# Altium PCB Tube02.PcbDoc
Units mil, origin at the board's own origin, x right, y up, seen from the top; angles counter-clockwise.
Board outline 3880 x 3880 mil, 2 copper layers (Top Layer, Bottom Layer); 105 components, 67 nets, 361 pads, 56 vias.
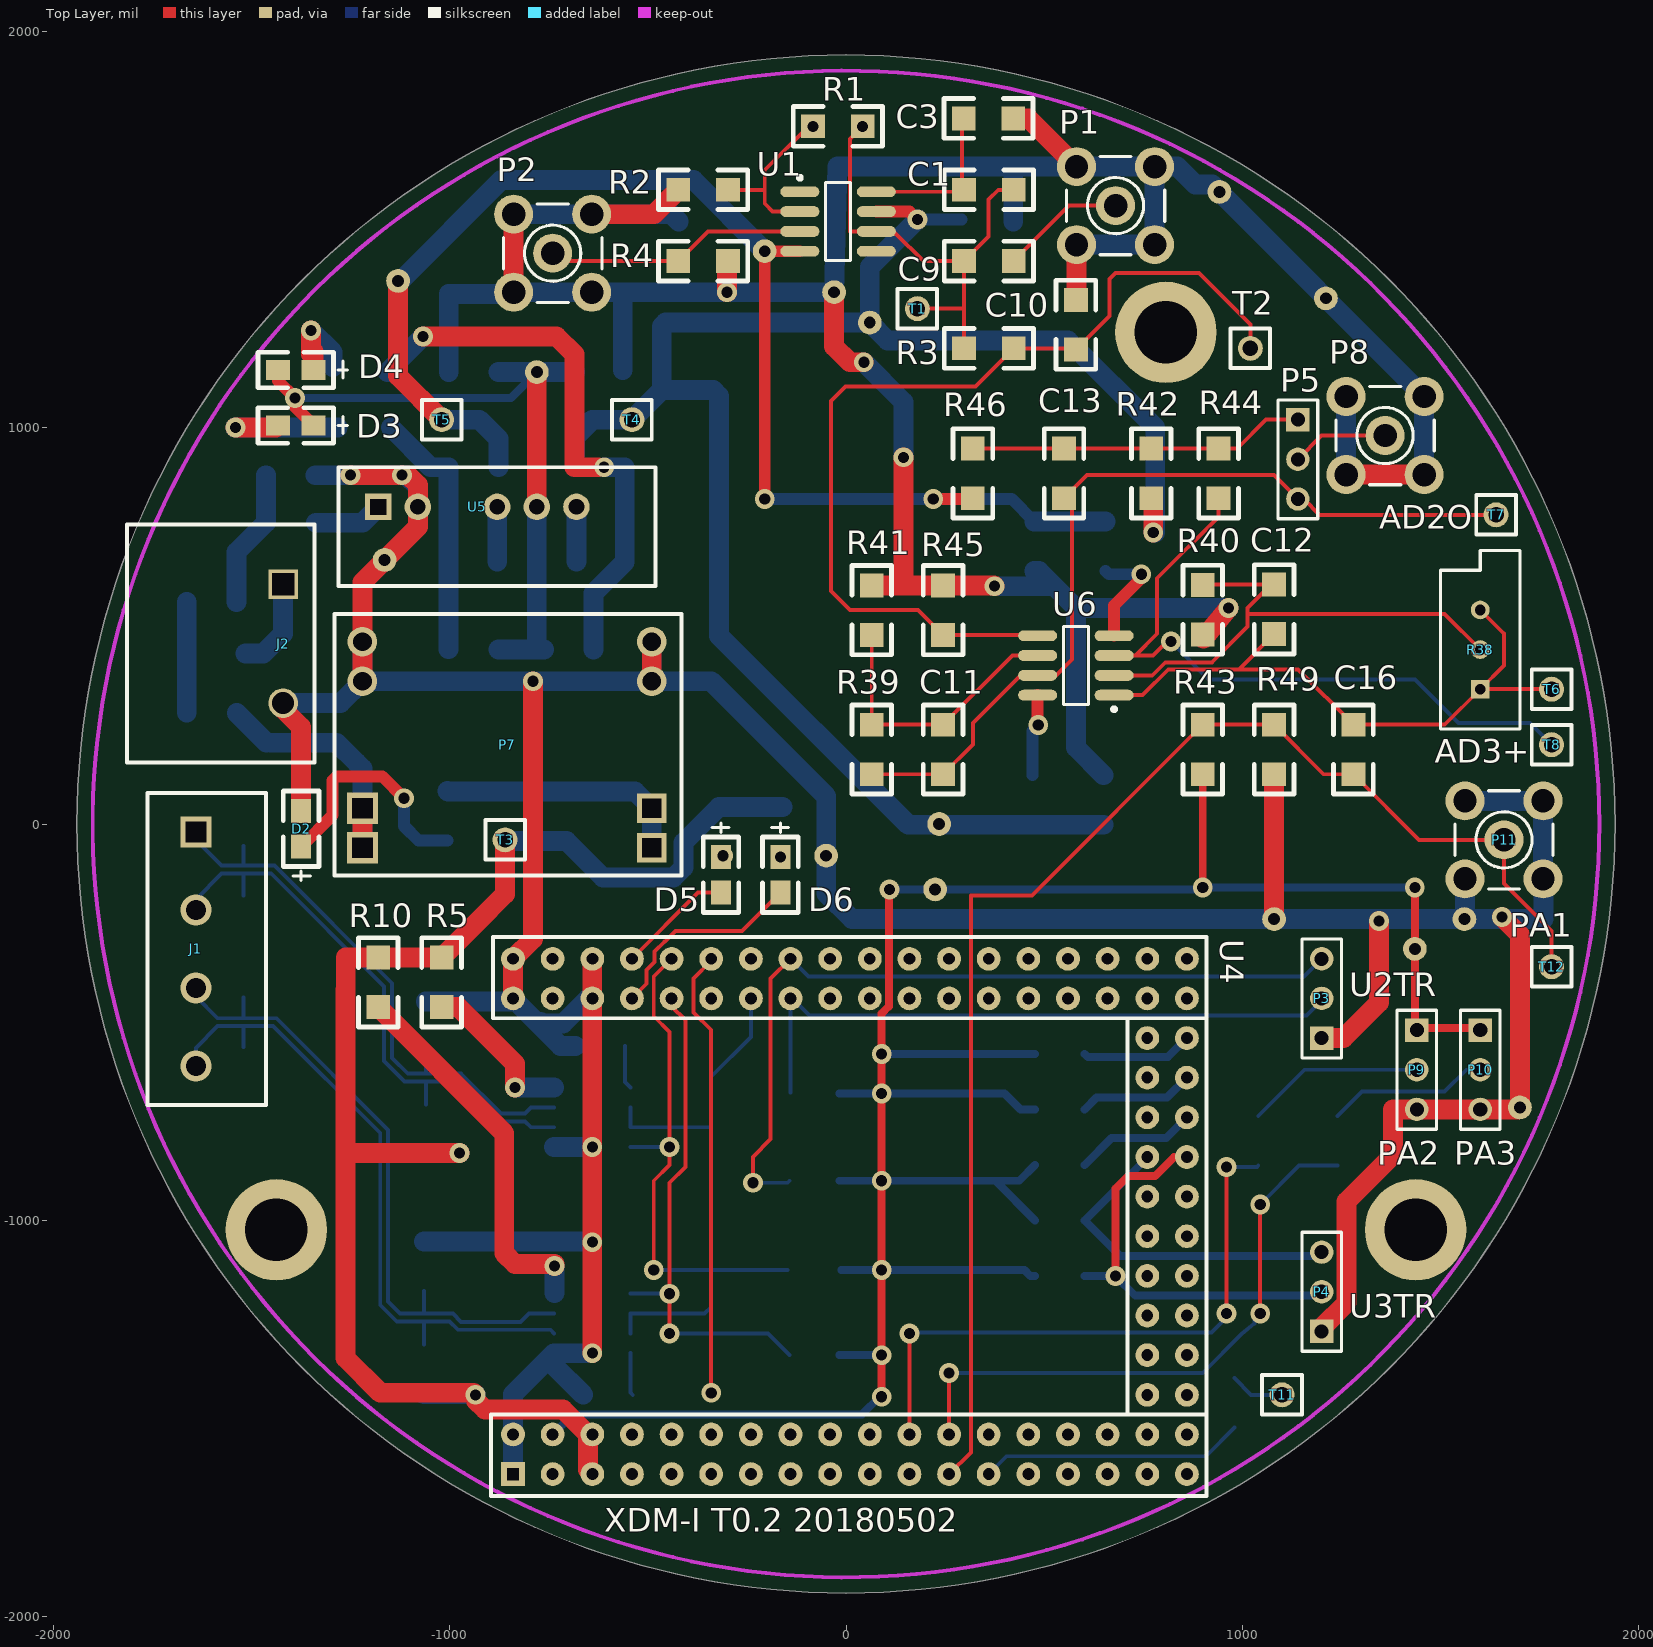
[diagram p0: Top Layer view]
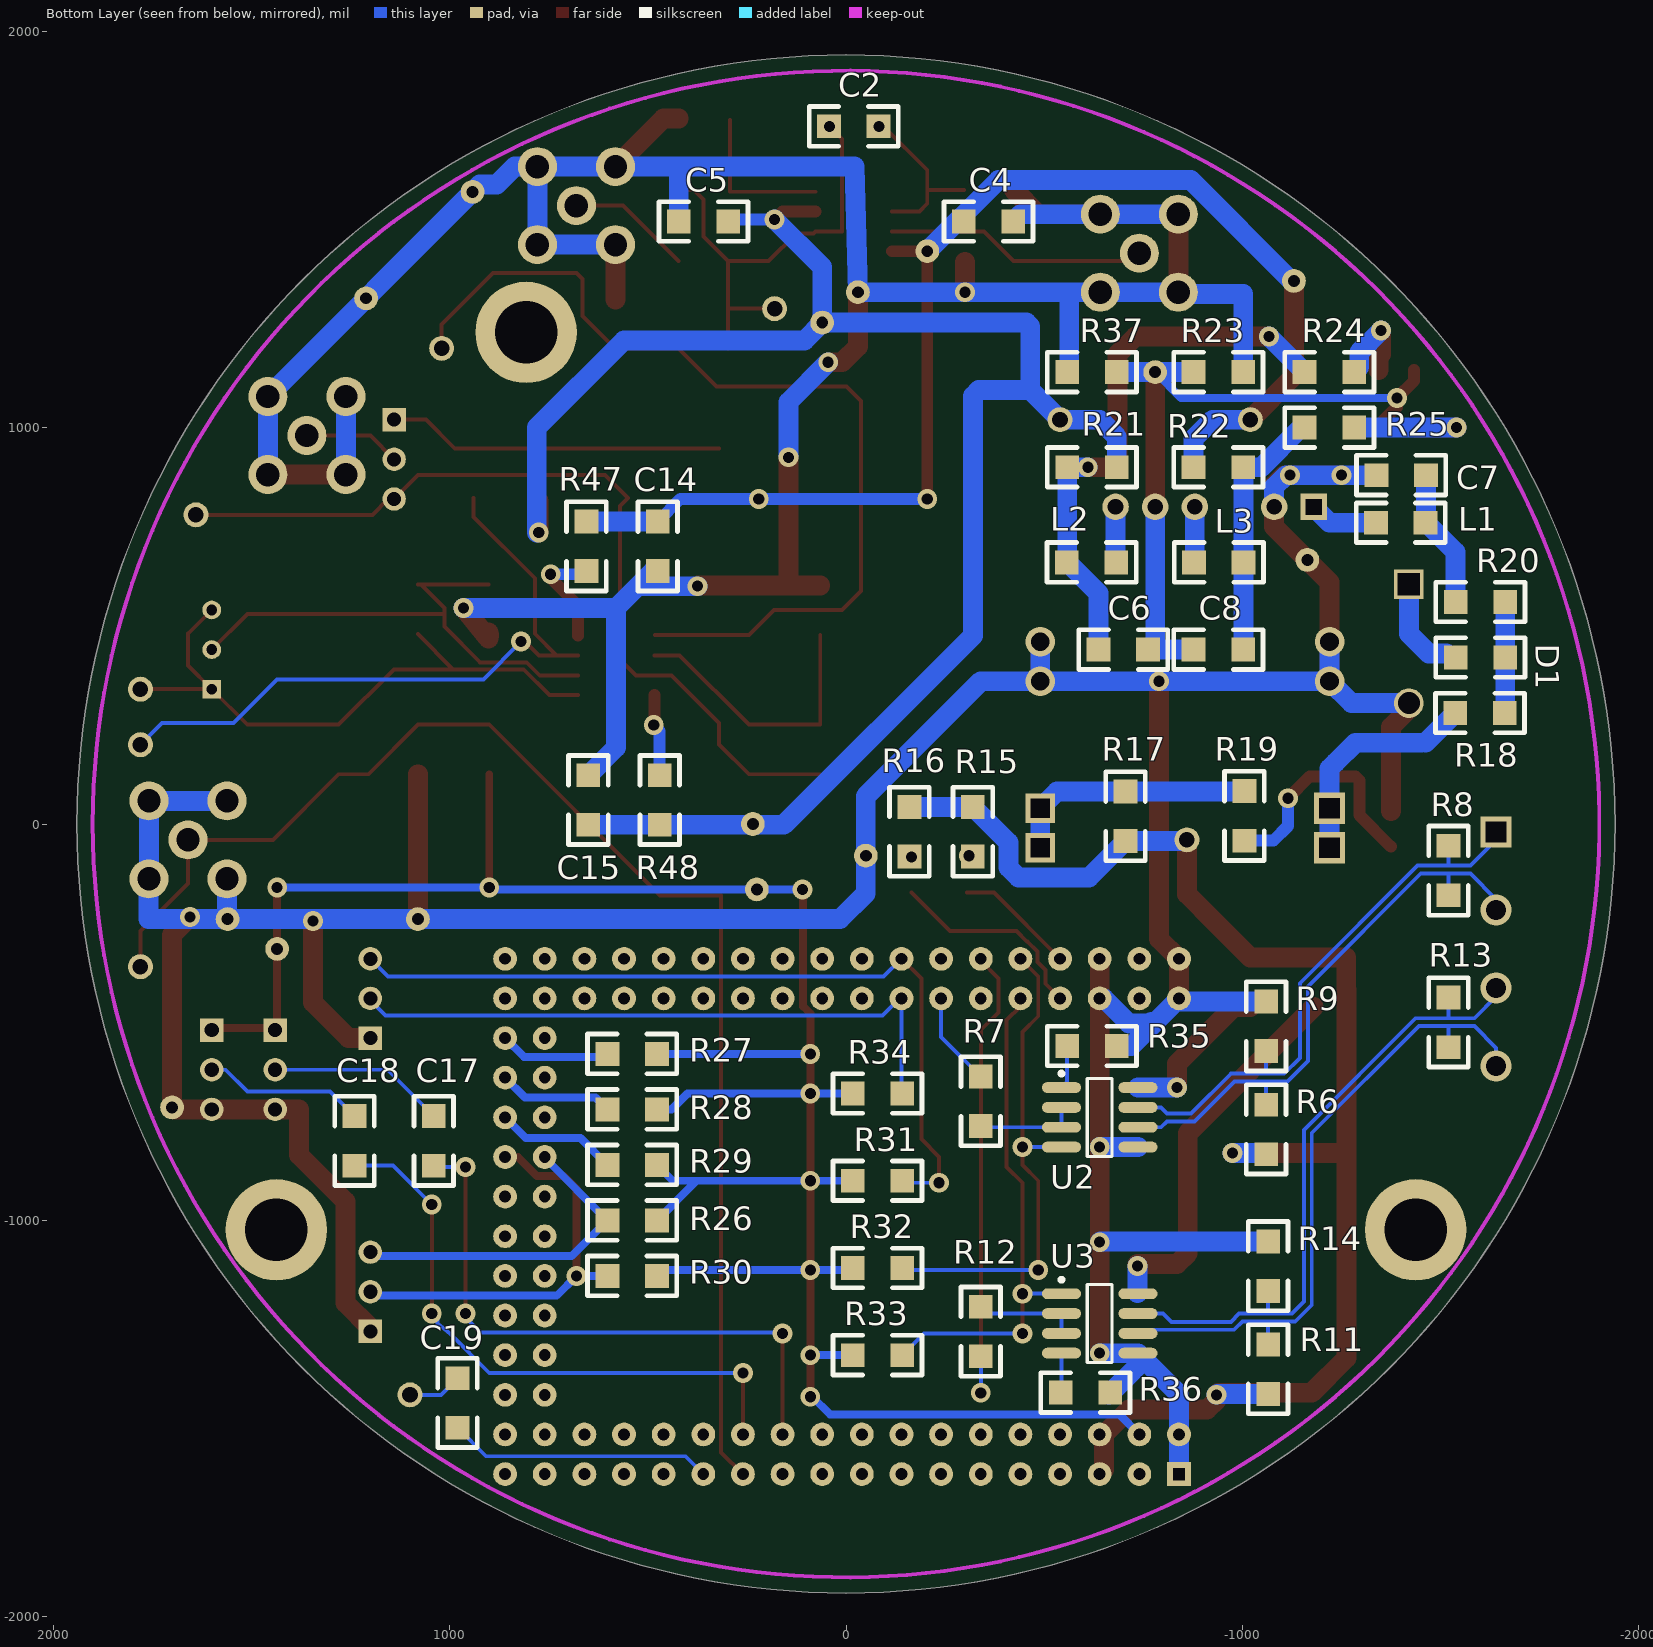
[diagram p1: Bottom Layer view, seen from below]

## Layer stack, top to bottom
Top Layer: signal copper 1.4
Dielectric: dielectric 12.6, FR-4, Dk 4.8
Bottom Layer: signal copper 1.4

## Board outline
0,-1940 cw(c0,0) -1940,0 cw(c0,0) 0,1940 cw(c0,0) 1940,0 cw(c0,0)

## Design rules (kind name [scope] priority, off if disabled: settings)
Clearance [All] p1: gap=8
ComponentClearance [All] p1 off: gap=10 collisioncheckmode=3 verticalgap=10 showdistances=FALSE
DiffPairsRouting [All] p1: maxlimit=10 minlimit=10 mostfreqgap=10 maxuncoupledlength=500
HoleSize [All] p1: absolutevalues=TRUE maxlimit=200 minlimit=1 maxpercent=80.000 minpercent=20.000
PolygonConnect [All] p1: connectstyle=Relief reliefconductorwidth=10 reliefentries=4 polygonreliefangle="90 Angle"
RoutingVias [All] p1: holewidth=25 width=40 viastyle="Through Hole" minholewidth=28 minwidth=50 maxholewidth=28 maxwidth=50
SilkscreenOverComponentPads [All] p1: minsilkscreentomaskgap=10
SolderMaskExpansion [All] p1: expansion=4
Width Width_5V [InNet('VCC5')] p1: maxlimit=50 minlimit=20 preferedwidth=50
Width Width_All [All] p2: maxlimit=50 minlimit=10 preferedwidth=10
Width Width_VCC5- [InNet('VCC5-')] p3: maxlimit=50 minlimit=20 preferedwidth=50
Width Width_VCC5+ [InNet('VCC5+')] p4: maxlimit=50 minlimit=20 preferedwidth=50
Width Width_12 [InNet('VCC12')] p5: maxlimit=50 minlimit=20 preferedwidth=50
24 further rules are at their usual default settings.

## Classes and differential pairs
component class AMP02: C1 C2 C3 C4 C5 C9 C10 C11 C12 C13 C14 C15 C16 P1 P2 P5 P8 R1 R2 R3 R4 R38 R39 R40 R41 R42 R43 R44 R45 R46 R47 R48 R49 T1 T2 T6 T7 T8 T12 U1 U6
component class MCU02: C17 C18 C19 D5 D6 P9 P10 P11 R15 R16 R26 R27 R28 R29 R30 R31 R32 R33 R34 T11 U4 U7 U8
component class Power02: C6 C7 C8 D1 D2 D3 D4 J2 L1 L2 L3 P7 R17 R18 R19 R20 R21 R22 R23 R24 R25 R37 T3 T4 T5 U5
component class Commu02: J1 P3 P4 R5 R6 R7 R8 R9 R10 R11 R12 R13 R14 R35 R36 U2 U3
differential pair CON2: +CON2_P -CON2_N
differential pair CON1: +CON1_P -CON1_N

## Components (designator, comment, footprint, x,y, rotation, side; value= is the part's Value field where it differs from the comment)
C1 "Cap Semi" 1206 300,1600 r0 top
C2 "Cap Semi" 1206 -80,1760 r0 bottom
C3 "Cap Semi" 1206 420,1780 r180 top
C4 "Cap Semi" 1206 -420,1520 r0 bottom
C5 "Cap Semi" 1206 420,1520 r180 bottom
C6 "Cap Semi" 1206 -760,440 r0 bottom
C7 "Cap Semi" 1206 -1340,880 r180 bottom
C8 "Cap Semi" 1206 -1000,440 r0 bottom
C9 "Cap Semi" 1206 300,1420 r0 top
C10 "Cap Semi" 1206 580,1320 r270 top
C11 "Cap Semi" 1206 245,248.5 r270 top
C12 "Cap Semi" 1206 1080,602 r270 top
C13 "Cap Semi" 1206 550,824 r90 top
C14 "Cap Semi" 1206 475,640 r90 bottom
C15 "Cap Semi" 1206 650,121 r270 bottom
C16 "Cap Semi" 1206 1280,248.5 r270 top
C17 "Cap Semi" 1206 1040,-860 r90 bottom
C18 "Cap Semi" 1206 1240,-860 r90 bottom
C19 "Cap Semi" 1206 980,-1400 r270 bottom
D1 "LED2" 1206 -1540,420 r180 bottom
D2 "LED2" 0805_LED -1380,-60 r90 top
D3 "LED2" 0805_LED -1340,1000 r180 top
D4 "LED2" 0805_LED -1340,1140 r180 top
D5 "LED2" 0805_led -310,-80 r270 top
D6 "LED2" 0805_led -160,-80 r270 top
J1 "KF301-4P" KF301-4P -1640,-20 r270 top locked
J2 "XK7.62-2P" XK7.62-2P -1420,605 r0 top locked
L1 "Inductor" 1206 -1460,760 r0 bottom
L2 "Inductor" 1206 -680,660 r0 bottom
L3 "Inductor" 1206 -880,660 r180 bottom
P1 "SMB" SMB_V-RJ45 680,1560 r0 top (schematic designator P2)
P2 "SMB" SMB_V-RJ45 -740,1440 r0 top
P3 "Header 3" HDR1X3 1200,-540 r90 top
P4 "Header 3" HDR1X3 1200,-1280 r90 top
P5 "Header 3" HDR1X3 1140,1020 r270 top
P7 "DC-DC5V3A" DC-DC3A -1220,460 r0 top locked
P8 "SMB" SMB_V-RJ45 1360,980 r0 top (schematic designator P1)
P9 "Header 3" HDR1X3 1440,-520 r270 top
P10 "Header 3" HDR1X3 1600,-520 r270 top
P11 "SMB" SMB_V-RJ45 1660,-40 r0 top (schematic designator P6)
R1 "Res Semi" 1206 40,1760 r180 top
R2 "Res Semi" 1206 -300,1600 r180 top
R3 "Res Semi" 1206 300,1200 r0 top
R4 "Res Semi" 1206 -300,1420 r180 top
R5 "Res Semi" 1206 -1020,-460 r90 top
R6 "Res Semi" 1206 -1060,-710 r270 bottom
R7 "Res Semi" 1206 -340,-760 r90 bottom
R8 "Res Semi" 1206 -1520,-57 r270 bottom
R9 "Res Semi" 1206 -1060,-450 r270 bottom
R10 "Res Semi" 1206 -1180,-460 r90 top
R11 "Res Semi" 1206 -1065,-1315 r270 bottom
R12 "Res Semi" 1206 -340,-1220 r270 bottom
R13 "Res Semi" 1206 -1520,-440 r270 bottom
R14 "Res Semi" 1206 -1065,-1055 r270 bottom
R15 "Res Semi" 1206 -320,-80 r90 bottom
R16 "Res Semi" 1206 -160,-80 r90 bottom
R17 "Res Semi" 1206 -705,80 r270 bottom
R18 "Res Semi" 1206 -1660,280 r0 bottom
R19 "Res Semi" 1206 -1005,-40 r90 bottom
R20 "Res Semi" 1206 -1540,560 r180 bottom
R21 "Res Semi" 1206 -560,900 r180 bottom
R22 "Res Semi" 1206 -1000,900 r0 bottom
R23 "Res Semi" 1206 -1000,1140 r0 bottom
R24 "Res Semi" 1206 -1280,1140 r0 bottom
R25 "Res Semi" 1206 -1280,1000 r0 bottom
R26 "Res Semi" 1206 600,-1000 r180 bottom
R27 "Res Semi" 1206 600,-580 r180 bottom
R28 "Res Semi" 1206 600,-720 r180 bottom
R29 "Res Semi" 1206 600,-860 r180 bottom
R30 "Res Semi" 1206 600,-1140 r180 bottom
R31 "Res Semi" 1206 -140,-900 r0 bottom
R32 "Res Semi" 1206 -140,-1120 r0 bottom
R33 "Res Semi" 1206 -140,-1340 r0 bottom
R34 "Res Semi" 1206 -140,-680 r0 bottom
R35 "Res Semi" 1206 -560,-560 r180 bottom
R36 "Res Semi" 1206 -543.54,-1434.46 r180 bottom
R37 "Res Semi" 1206 -560,1140 r180 bottom
R38 "RPot" VR5 1600,440 r90 top
R39 "Res Semi" 1206 65,248.5 r270 top
R40 "Res Semi" 1206 900,480 r90 top
R41 "Res Semi" 1206 65,600 r270 top
R42 "Res Semi" 1206 770,945 r270 top
R43 "Res Semi" 1206 900,248.5 r270 top
R44 "Res Semi" 1206 940,824 r90 top
R45 "Res Semi" 1206 245,600 r270 top
R46 "Res Semi" 1206 320,824 r90 top
R47 "Res Semi" 1206 655,761 r270 bottom
R48 "Res Semi" 1206 470,0 r90 bottom
R49 "Res Semi" 1206 1080,127.5 r90 top
T1 "TP1" TP1 180,1300 r0 top
T2 "TP1" TP1 1020,1200 r0 top
T3 "TP1" TP1 -860,-40 r0 top
T4 "TP1" TP1 -540,1020 r0 top
T5 "TP1" TP1 -1020,1020 r0 top
T6 "TP1" TP1 1780,340 r0 top
T7 "TP1" TP1 1640,780 r0 top
T8 "TP1" TP1 1780,200 r0 top
T11 "TP1" TP1 1100,-1440 r0 top
T12 "TP1" TP1 1780,-360 r0 top
U1 "AD797" SO-8C_M -20,1520 r0 top locked
U2 "MAX481CSA" NSO8_M -640,-740 r180 bottom
U3 "MAX481CSA" NSO8_M -640,-1260 r180 bottom
U4 "MCU_CON" MCU_CON -840,-1640 r0 top locked
U5 "A1205S" A1205S -1280,900 r0 top locked
U6 "NE5532AP" SO-8C_M 580,400 r180 top (schematic designator U4)

## Footprints (in the part's own frame and the unit in brackets; to place one, negate y for a bottom-side part, rotate by r counter-clockwise, add the part's x,y. Pads: shape width x height; smd on the part's side, far side on the other; paste and mask are expansions set on the pad)
0805_LED [mil]
  rect 60x50 smd: 1(3.07,-5.36) 2(93.07,-5.36)
  silkscreen extent -82,-50 143,40
0805_led [mil]
  rect 60x50 smd: 1(3.07,-5.36) 2(93.07,-5.36)
  silkscreen extent -82,-50 143,40
1206 [mil]
  rect 60x60 smd: 1(-2,0) 2(123,0)
  silkscreen extent -52,-50 173,50
A1205S [mm]
  rect 1.7x1.7 hole 1 square: 1(2.54,-2.54)
  round 1.7 hole 1: 2(5.08,-2.54) 4(10.16,-2.54) 5(12.7,-2.54) 6(15.24,-2.54)
  silkscreen extent 0,-7.62 20.32,0
DC-DC3A [mm] "DC-DC5V3Amodule"
  round 1.9 hole 1.2: 1(0,0) 2(0,-2.54) 7(18.542,-2.54) 8(18.542,0)
  rect 2x2 hole 1.3 square: 3(0,-10.668) 4(0,-13.208)
  rect 1.9x1.9 hole 1.2 square: 5(18.542,-13.208) 6(18.542,-10.668)
  silkscreen extent -1.78,-14.99 20.45,1.78
HDR1X3 [mm] "Connector; Header; 3 Position"
  rect 1.5x1.5 hole 0.9: 1(0,0)
  round 1.5 hole 0.9: 2(2.54,0) 3(5.08,0)
  silkscreen extent -1.27,-1.27 6.35,1.27
KF301-4P [mm]
  rect 2x2 hole 1.3 square: 1(0,0)
  round 2 hole 1.3: 2(5,0) 3(10,0) 4(15,0)
  silkscreen extent -2.5,-3.1 17.5,4.5
MCU_CON [mil] "Connector for STM32F407VET6 mini Borad"
  rect 60x60 hole 30 square: 1(0,0)
  round 60 hole 30: 2(0,100) 3(100,0) 4(100,100) 5(200,0) 6(200,100) 7(300,0) 8(300,100) 9(400,0) 10(400,100) 11(500,0) 12(500,100) 13(600,0) 14(600,100) 15(700,0) 16(700,100) 17(800,0) 18(800,100) 19(900,0) 20(900,100) 21(1000,0) 22(1000,100) 23(1100,0) 24(1100,100) 25(1200,0) 26(1200,100) 27(1300,0) 28(1300,100) 29(1400,0) 30(1400,100) 31(1500,0) 32(1500,100) 33(1600,0) 34(1600,100) 35(1700,0) 36(1700,100) 37(1700,200) 38(1600,200) 39(1700,300) 40(1600,300) 41(1700,400) 42(1600,400) 43(1700,500) 44(1600,500) 45(1700,600) 46(1600,600) 47(1700,700) 48(1600,700) 49(1700,800) 50(1600,800) 51(1700,900) 52(1600,900) 53(1700,1000) 54(1600,1000) 55(1700,1100) 56(1600,1100) 57(0,1300) 58(0,1200) 59(100,1300) 60(100,1200) 61(200,1300) 62(200,1200) 63(300,1300) 64(300,1200) 65(400,1300) 66(400,1200) 67(500,1300) 68(500,1200) 69(600,1300) 70(600,1200) 71(700,1300) 72(700,1200) 73(800,1300) 74(800,1200) 75(900,1300) 76(900,1200) 77(1000,1300) 78(1000,1200) 79(1100,1300) 80(1100,1200) 81(1200,1300) 82(1200,1200) 83(1300,1300) 84(1300,1200) 85(1400,1300) 86(1400,1200) 87(1500,1300) 88(1500,1200) 89(1600,1300) 90(1600,1200) 91(1700,1300) 92(1700,1200)
  silkscreen extent -55,-55 1750,1355
NSO8_M [mm] "SOIC, 8-Leads, Body 4.9x3.9mm, Pitch 1.27mm, IPC Low Density"
  oval 2.5x0.7 smd: 1(-2.45,1.905) 2(-2.45,0.635) 3(-2.45,-0.635) 4(-2.45,-1.905) 5(2.45,-1.905) 6(2.45,-0.635) 7(2.45,0.635) 8(2.45,1.905)
  silkscreen extent -2.58,-2.5 0.8,2.93, body extent -2,-2.5 2,2.5, height 1.75
SMB_V-RJ45 [mm] "Connector; SMB Straight"
  round 2.5 hole 1.5: 1(0,0) 2(-2.5,-2.5) 2(-2.5,2.5) 2(2.5,-2.5) 2(2.5,2.5)
  silkscreen extent -3.15,-3.15 3.15,3.15
SO-8C_M [mm] "SOIC, 8-Leads, Body 4.9x3.9mm, Pitch 1.27mm, IPC Low Density"
  oval 2.5x0.7 smd: 1(-2.45,1.905) 2(-2.45,0.635) 3(-2.45,-0.635) 4(-2.45,-1.905) 5(2.45,-1.905) 6(2.45,-0.635) 7(2.45,0.635) 8(2.45,1.905)
  silkscreen extent -2.57,-2.5 0.8,2.93, body extent -2,-2.5 2,2.5, height 1.75
TP1 [mm] "Test Point 1"
  round 1.6 hole 1: 1(0,0)
  silkscreen extent -1.27,-1.27 1.27,1.27
VR5 [mm] "Variable Resistor, Thru-Hole; 3 Leads"
  rect 1.2x1.2 hole 0.7: 1(-2.54,0)
  round 1.2 hole 0.7: 2(0,0) 3(2.54,0)
  silkscreen extent -5.08,-2.54 6.35,2.54
XK7.62-2P [mm]
  rect 1.9x1.9 hole 1.4 square: 1(0,0)
  round 1.9 hole 1.4: 2(0,-7.62)
  silkscreen extent -10,-11.43 2,3.81

## Part data
C1 C2 C3 C4 C5 C6 C7 C8 C9 C10 C11 C12 C13 C14 C15 C16 C17 C18 C19: "Capacitor (Semiconductor SIM Model)"
D1: library part "Diode 1N4001", "1 Amp General Purpose Rectifier"
D2 D3 D4 D5 D6: "Typical RED, GREEN, YELLOW, AMBER GaAs LED"
P1 P2 P8 P11: "SMB Straight Connector"
P3 P4 P5 P9 P10: "Header, 3-Pin"
P7: library part DC-DC3A
R1 R2 R3 R4 R5 R6 R7 R8 R9 R10 R11 R12 R13 R14 R15 R16 R17 R18 R19 R20 R21 R22 R23 R24 R25 R26 R27 R28 R29 R30 R31 R32 R33 R34 R35 R36 R37 R39 R40 R41 R42 R43 R44 R45 R46 R47 R48 R49: "Semiconductor Resistor"
R38: "Potentiometer"
U1: library part AD797AR, "Ultra-Low Distortion, Ultra-Low Noise Operational Amplifier"
U2 U3: "Low-Power, Slew-Rate-Limited RS-485/RS-422 Transceiver"
U6: "Dual Low-Noise Operational Amplifier"

## Free pads (board coordinates)
  round 60 hole 30: 0(-50,-80) 0(-30,1341.57) 1(60,1265) 1(1080,-240) 2(-1163.79,666.21) 2(-205,1445) 2(942.12,1594.73) 3(-780,1140) 3(1210.58,1326.27) 4(-1130,1370) 4(1435,-315) 5(1560,-240) 6(225,-165) 7(235,0) 8(1700,-715)
  round 255.91 hole 157.48: 1(-1437.01,-1023.62) 1(807.09,1240.16) 1(1437.01,-1023.62)

## Via types
v1: diameter 50, hole 28, Top Layer to Bottom Layer, 56 vias

## Nets (pads, with @x,y where several pads share a name; then routed paths per layer and width w, separated by ;. In a path a pad name is that pad's centre, name@x,y a point inside that pad or via, vN(x,y) a via of type N, cw(c..) or ccw(c..) an arc to the next point about the centre after c; other vN are vias at no path point)
AD1_IN+: P2.1 R4.2 U1.3 | length 662.9
  Top Layer w10: P2.1 -720,1420 R4.2 -348,1495 U1.3
AD1_IN-: C2.1 R1.2 R2.1 U1.2 | length 442.4
  Top Layer w10: R2.1 -205,1600 ; U1.2 -185,1545 -205,1565 -205,1600 ; v1(-83,1760) -95,1760 -205,1650 -205,1600
AD1_OUT: C1.2 C2.2 C9.1 R1.1 R3.1 T1.1 U1.6 | length 1189.4
  Top Layer w10: v1(42,1760) 10,1728 10,1495 U1.6 81.46,1490 125,1490 195,1420 C9.1 ; T1.1 298,1300 ; R3.1 298,1300 ; C1.2 385,1600 360,1575 360,1482 C9.1 ; 298,1300 C9.1
AD2+: C10.2 R3.2 R45.2 T2.1 U6.5 | length 2402.9
  Top Layer w10: U6.5@481.54,477 R45.2 182,540 10,540 -38,588 -38,1067 -1.5,1103.5 326.5,1103.5 R3.2 C10.2@577,1200 ; C10.2 665,1282 665,1375 680,1390 890,1390 1020,1260 T2.1
AD2-: C11.1 R39.1 R41.2 U6.6 | length 717.3
  Top Layer w10: R41.2 R39.1 C11.1 419.5,425 U6.6
AD2_OUT: C11.2 C13.1 P5.3 R39.2 T7.1 U6.7 | length 2227.6
  Top Layer w10: R39.2 C11.2 320,200.5 320,255 440,375 U6.7 530,375 570,415 570,802 C13.1 608,880 1080,880 P5.3 1155,820 1195,780 T7.1
AD3+: R44.1 T8.1 U6.3 | length 1709.7
  Top Layer w10: U6.3 730,425 ; v1(820,460) 810,460 775,425 730,425 ; R44.1 940,775 785,620 785,480 730,425
  Bottom Layer w10: v1(820,460) 915,365 1435,365 1545,255 1725,255 T8.1
AD3+B: C13.2 P5.1 R42.1 R44.2 R46.2 | length 850.2
  Top Layer w10: R46.2 C13.2 R42.1 R44.2 987,947 1060,1020 P5.1
AD3-: C12.1 R38.2 R40.2 U6.2 | length 1317.2
  Top Layer w10: U6.2 772.54,375 805.54,408 923,408 1013.19,498.19 1013.19,530 ; R40.2@902,604 C12.1 ; C12.1@1070,602 1013.19,545.19 1013.19,530 ; R38.2 1510,530 1013.19,530
AD3_OUT: C12.2 C16.1 R38.1 R38.3 T6.1 U6.1 | length 1600.9
  Top Layer w10: U6.1 748,325 813,390 991,390 ; C12.2 991,390 ; R38.3 1660,480 1660,400 R38.1 ; T6.1 R38.1 ; 991,390 1140.5,390 C16.1 1510.5,250.5 R38.1
AGND: C3.1 C4.1 C5.1 C10.1 C14.1 C15.1 P1.2 P2.2 P8.2 pad.0@-30,1341.57 pad.2@942.12,1594.73 pad.3@1210.58,1326.27 R2.2 R4.1 R23.1 R37.1 R40.1 R41.1 R45.1 | length 8205.3
  Top Layer w50: P2.2@-838.43,1341.57 P2.2@-838.43,1538.43 ; P2.2@-641.57,1538.43 -484.57,1538.43 R2.2 ; v1(-300,1341.57) R4.1@-300,1418 ; pad.0@-30,1341.57 -30,1205 10,1165 v1(45,1165) ; R41.1 145,602 ; v1(145,925) 145,602 ; v1(375,600) 373,602 R45.1 145,602 ; C3.1 460,1780 P1.2@581.57,1658.43 ; C10.1@581.57,1323.57 P1.2@581.57,1461.57 ; R40.1 R40.1@901.7,467.9 ; R40.1@901.7,482.9 R40.1@901.7,467.9 ; v1(965,545) 905.97,473.1 R40.1@901.7,467.9 ; P8.2@1261.57,881.57 P8.2@1458.43,881.57
  Bottom Layer w50: R23.1 -1002,1337 P2.2@-838.43,1337 ; P2.2@-838.43,1341.57 -641.57,1341.57 -563.43,1341.57 ; P2.2@-838.43,1538.43 -641.57,1538.43 -440.43,1538.43 C4.1 ; R37.1@-563.43,1145.43 -563.43,1341.57 ; v1(45,1165) 145,1065 v1@145,930 ; v1(375,600) 525,600 ; C5.1 422,1656.43 ; C14.1 487,638 525,600 ; P1.2@581.57,1461.57 778.43,1461.57 P1.2@778.43,1658.43 ; C15.1 580,193 580,545 ; v1(965,545) 580,545 ; P8.2@1261.57,881.57 P8.2@1261.57,1078.43 ; P8.2@1458.43,881.57 1458.43,1078.43 923.95,1612.9 881.18,1612.9 835.65,1658.43 P1.2@778.43,1658.43 ; -563.43,1341.57 v1(-300,1341.57) -30,1341.57 -21.57,1658.43 581.57,1658.43 P1.2@778.43,1658.43 ; 525,600 580,545
AVCC+: C5.2 C15.2 pad.1@60,1265 pad.7 R21.2 R42.2 R48.1 T4.1 U1.7 | length 4665.1
  Top Layer w30: U1.7 160,1545 v1(180,1525)
  Top Layer w50: v1(775,735) R42.2@775,815
  Bottom Layer w30: v1(180,1525) C5.2@292,1525
  Bottom Layer w50: R21.2 -683,977 -640,1020 T4.1 -465,1095 ; v1(180,1525) 60,1405 pad.1@60,1265 ; C15.2 R48.1 157,-2 -320,475 -320,1080 -335,1095 -465,1095 ; v1@780,735 780,1000 560,1220 105,1220 pad.1@60,1265 ; -465,1095 -465,1255 -455,1265 pad.1@60,1265
AVCC-: C4.2 C14.2 pad.2@-205,1445 pad.4@-1130,1370 R22.2 R46.1 R47.1 T5.1 U1.4 | length 3408.2
  Top Layer w30: v1(-205,820) -205,1445 U1.4 ; 245,820 R46.1@318,820
  Top Layer w50: pad.4@-1130,1370 -1130,1130 T5.1
  Bottom Layer w30: pad.4@-1128,1368 pad.4@-1126,1370 ; v1(-205,820) v1(220,820) 418,820 C14.2
  Bottom Layer w50: pad.4@-1130,1370 -1126,1370 -1124.08,1370 -869.58,1624.5 -384.5,1624.5 pad.2@-205,1445 ; T5.1 -925,1020 -877,972 R22.2 ; C14.2 R47.1
COM: C6.1 C8.2 D3.1 D4.2 pad.3@-780,1140 R23.2 R37.2 U5.5 | length 1805.2
  Top Layer w30: D4.2 -1433.07,1118.07 v1(-1390,1075) -1390,1052.29 D3.1
  Top Layer w50: U5.5 pad.3@-780,1140
  Bottom Layer w20: v1(-1390,1075) -845,1075 pad.3@-780,1140
  Bottom Layer w50: C8.2 C6.1 ; R23.2 -780,1140 R37.2 ; C6.1@-780,458 U5.5
CON1_N: J1.1 R8.1 R9.2 U2.7 | length 1433.6
  Bottom Layer w10: J1.1 -1640,-40 -1575,-105 -1520,-105 ; R8.1 -1520,-105 ; R9.2 -1060,-630 ; U2.7 -795,-715 -810,-730 -870,-730 -870.86,-730.86 -971.72,-630 -1060,-630 ; -1520,-105 -1441.72,-105 -1145,-401.72 -1145,-590 -1105,-630 -1060,-630
CON1_P: J1.2 R6.1 R8.2 U2.6 | length 1446.4
  Bottom Layer w10: J1.2 -1640,-190 -1575,-125 -1520,-125 ; R8.2 -1520,-125 ; R6.1 -1060,-650 ; U2.6 -795,-765 -810,-750 -861.72,-750 -862.57,-750.86 -879.14,-750.86 -980,-650 -1060,-650 ; -1520,-125 -1450,-125 -1165,-410 -1165,-598.28 -1113.28,-650 -1060,-650
CON2_N: J1.3 R13.1 R14.2 U3.7 | length 1637.5
  Bottom Layer w10: J1.3 -1640,-435 -1585,-490 -1520,-490 ; R13.1 -1520,-490 ; R14.2 -1065,-1235 ; -820,-1255 -820.86,-1255.86 ; U3.7 -800,-1235 -820.86,-1255.86 ; -1520,-490 -1436.72,-490 -1155,-771.72 -1155,-1205 -1125,-1235 -1065,-1235 ; -1065,-1235 -991.72,-1235 -970.86,-1255.86 -820.86,-1255.86
CON2_P: J1.4 R11.1 R13.2 U3.6 | length 1657.7
  Bottom Layer w10: J1.4 -1640,-565 -1585,-510 -1520,-510 ; R13.2 -1520,-510 ; R11.1 -1065,-1255 ; U3.6 -745.6,-1275.86 -979.14,-1275.86 -1000,-1255 -1065,-1255 ; -1520,-510 -1445,-510 -1175,-780 -1175,-1213.28 -1133.28,-1255 -1065,-1255
CTRL1: R7.2 U4.70 | length 238.4
  Bottom Layer w10: R7.2 -240,-537 -240,-489.25 U4.70
CTRL2: R12.2 U4.67 | length 1224.3
  Top Layer w10: v1(-340,-1435) -340,-520 -385,-475 -385,-390 -340,-345 U4.67
  Bottom Layer w10: v1(-340,-1435) R12.2
D11: R29.1 U4.51 | length 307.7
  Bottom Layer w20: R29.1 670,-792 808,-792 U4.51
D13: R28.1 U4.53 | length 291.1
  Bottom Layer w20: R28.1 632,-690 810,-690 U4.53
D15: R27.1 U4.55 | length 281.2
  Bottom Layer w20: R27.1 610,-588 812,-588 U4.55
GND: C7.1 D2.2 J2.2 P3.1 P4.1 P7.1 P7.2 P7.7 P7.8 P9.3 P10.3 P11.2 pad.0@-50,-80 pad.1@1080,-240 pad.2@-1163.79,666.21 pad.5 pad.8 R9.1 R14.1 R35.2 R36.2 R49.1 U2.5 U3.5 U4.1 U4.2 U4.57 U4.58 U4.61 U4.62 U5.2 | length 11504.1
  Top Layer w50: J2.2 -1420,290 -1374.64,244.64 D2.2 ; v1(-1250,880) -1105,880 -1080,855 U5.2 -1080,750 -1163.79,666.21 -1220,610 P7.1 P7.2 ; U4.58 U4.57 -790,-290 v1(-790,360) ; v1(-640,-1335) v1(-640,-1055) v1(-640,-815) U4.62 U4.61 ; P7.7 P7.8 ; pad.1@1080,-240 R49.1 ; P4.1 1200,-1270.95 1262.53,-1208.43 1262.53,-952.47 1380,-835 1380,-720 P9.3 1695,-720 pad.8 1700,-280 v1(1655,-235) ; P3.1 1255,-540 1345,-450 v1(1345,-245)
  Bottom Layer w50: J2.2 -1275,305 P7.2 ; C7.1 -1110,880 -1080,850 U5.2 ; P7.1 P7.2 ; R14.1 -642,-1053 v1(-640,-1055) ; R9.1 U4.58@-848,-448 ; U4.1 U4.2 -840,-1438.54 U3.5 v1(-640,-1335) ; U4.58 -720,-560 R35.2 ; -770.3,-498.79 -766.1,-503 -713.9,-503 -650.9,-440 U4.62 ; -736.46,-1366.54 R36.2@-663,-1440 ; U2.5 v1(-640,-815) ; P7.8 P7.7 ; pad.5@1561.57,-238.43 P11.2@1561.57,-138.43 ; P11.2@1561.57,58.43 1758.43,58.43 P11.2@1758.43,-138.43 ; P11.2@1760,-140 1760,-240 15,-240 -50,-175 -50,70 -340,360 P7.7 ; P7.2 v1(-790,360) P7.7
  other v1: -1120,880
LED1: D5.2 U4.63 | length 303.8
  Top Layer w10: U4.63 -373.07,-173.07 D5.2@-305.36,-173.07
LED2: D6.2 U4.64 | length 520.8
  Top Layer w10: U4.64 -503,-403 -503,-368 -483,-348 -483,-322.19 -457.81,-297 -457,-297 -430,-270 -262.29,-270 D6.2
NetC1_1: C1.1 C3.2 U1.8 | length 397.5
  Top Layer w10: U1.8 293,1595 C3.2@293,1776
NetC6_2: C6.2 L2.2 R21.1 R24.2 | length 1417.6
  Top Layer w50: v1(-1067,1230) -730,1230 -685,1185 -685,900 v1@-625,900
  Bottom Layer w50: R24.2 v1(-1067,1230) ; C6.2 -637,582 -558,661 R21.1 v1(-610,900)
NetC7_2: C7.2 L1.1 R20.1 | length 351.1
  Bottom Layer w50: R20.1 -1538,686 -1463,761 C7.2
NetC8_1: C8.1 L3.2 R22.1 R25.2 | length 645.4
  Bottom Layer w50: R25.2@-1147.98,1000 -1047.98,900 R22.1 ; C8.1@-1003,441 L3.2 R22.1@-1003,899
NetC9_2: C9.2 P1.1 | length 315
  Top Layer w10: C9.2 563,1560 P1.1
NetC17_2: C17.2 P9.2 | length 448.5
  Bottom Layer w10: C17.2 1157,-620 P9.2
NetC18_2: C18.2 P10.2 | length 408.5
  Bottom Layer w10: C18.2 1302,-675 1510,-675 1565,-620 P10.2
NetC19_1: C19.1 T11.1 | length 137.4
  Bottom Layer w10: C19.1 1022,-1440 T11.1
NetD1_1: D1.1 J2.1 | length 285
  Bottom Layer w50: J2.1 -1420,480 -1470,430 ; -1470,430 -1514.64,430 -1470,430
NetD2_1: D2.1 R19.1 | length 602.2
  Top Layer w30: D2.1 -1295,22.71 -1295,110 -1285,120 -1175,120 -1170,120 v1(-1115,65)
  Bottom Layer w30: v1(-1115,65) -1115,-5 -1078,-42 R19.1
NetD3_2: D3.2 R25.1 | length 359.6
  Top Layer w50: v1(-1540,1000) D3.2@-1438.44,1000
  Bottom Layer w50: v1(-1540,1000) R25.1
NetD4_1: D4.1 R24.1 | length 231.1
  Top Layer w50: v1(-1350,1245) -1350,1185 -1343.07,1191.93 D4.1
  Bottom Layer w50: v1(-1350,1245) -1295,1190 R24.1@-1295,1153
NetD5_1: D5.1 R15.1
  other v1: -310,-80
NetD6_1: D6.1 R16.1
  other v1: -165.36,-83.07
NetL1_2: L1.2 U5.1 | length 173.6
  Bottom Layer w50: L1.2 -1220,760 U5.1
NetL2_1: L2.1 U5.6 | length 138
  Bottom Layer w50: L2.1@-680,662 U5.6
NetL3_1: L3.1 U5.4 | length 138
  Bottom Layer w50: L3.1@-880,662 U5.4
NetP5_2: P5.2 P8.1 | length 244.9
  Top Layer w10: P5.2 1200,980 P8.1
NetP7_3: P7.3 P7.4 R18.2 | length 663
  Top Layer w50: P7.4 P7.3
  Bottom Layer w50: R18.2 -1462,205 ; -1450,205 -1285,205 -1235,155 -1220,140 P7.3 P7.4
NetP7_5: P7.5 P7.6 R17.1 R19.2 | length 632.8
  Bottom Layer w50: R19.2 -1004,82 R17.1 -532,82 P7.6 P7.5
NetR5_1: R5.1 U2.8 | length 402.8
  Top Layer w50: R5.1 -978,-462 -835,-605 v1(-835,-665)
  Bottom Layer w50: v1(-835,-665) U2.8
NetR7_1: R7.1 U2.2 U2.3 | length 253.5
  Bottom Layer w10: U2.2 U2.3 R7.1@-340,-765
NetR10_1: R10.1 U3.8 | length 964.4
  Top Layer w50: R10.1 -862,-780 -862,-1083 -835,-1110 -735,-1110 v1(-735,-1115)
  Bottom Layer w50: U3.8@-735,-1183.54 v1(-735,-1115)
NetR12_1: R12.1 U3.2 U3.3 | length 260.6
  Bottom Layer w10: U3.3 U3.2 -357,-1235 R12.1
NetR35_1: R35.1 U2.1 | length 111
  Bottom Layer w10: R35.1 -558,-650.54 U2.1
NetR36_1: R36.1 U3.4 | length 107.3
  Bottom Layer w10: U3.4 -543.54,-1434.46 R36.1@-538,-1440
NetR47_2: R47.2 U6.4 | length 297.2
  Top Layer w30: U6.4 676.46,551.46 750,625 v1(745,630)
  Bottom Layer w30: R47.2 663,630 v1(745,630) 750,630 v1@742,638
NetR48_2: R48.2 U6.8 | length 208.8
  Top Layer w30: U6.8 483.54,251.46 v1(485,250)
  Bottom Layer w30: R48.2 470,235 v1(485,250)
PA1: C16.2 P11.1 R43.1 R49.2 T12.1 U4.23 | length 3496.1
  Top Layer w10: U4.23 315,-1585 315,-180 469.5,-180 R43.1 R49.2 1205,125.5 C16.2 1445.5,-40 P11.1 1660,-150 1780,-270 T12.1
PA2: C17.1 U4.22 | length 1546.5
  Top Layer w10: U4.22 160,-1300 v1@175,-1285 ; v1(960,-1235) 960,-1245 v1(960,-865)
  Bottom Layer w10: v1@175,-1285 180,-1280 183,-1283 922,-1283 960,-1245 v1(960,-1235) ; v1(960,-865) 1037,-865 C17.1
  other v1: 160,-1285
PA3: C18.1 U4.24 | length 1521.1
  Top Layer w10: U4.24 v1(260,-1385) ; v1(1045,-1235) v1(1045,-960)
  Bottom Layer w10: v1(260,-1385) 900,-1385 998,-1287 1030,-1260 v1@1030,-1225 ; v1(1045,-960) 1143,-862 C18.1
PA4: C19.2 U4.25 | length 668.5
  Bottom Layer w10: U4.25 405,-1595 908,-1595 C19.2
U1RX: R33.1 U3.1 U4.66 | length 1300.4
  Top Layer w10: v1(-445,-1285) v1(-445,-1185) -445,-905 -405,-865 -405,-495 -440,-460 U4.66
  Bottom Layer w10: U3.1 v1(-445,-1185) ; v1(-445,-1285) -197,-1285 R33.1
U1TX: R32.1 U2.4 U4.65 | length 1273.3
  Top Layer w10: v1(-485,-1125) -485,-900 -445,-860 v1(-445,-815) -445,-525 -485,-485 -485,-385 U4.65
  Bottom Layer w10: U2.4 v1(-445,-815) ; v1(-485,-1125) R32.1@-147,-1125
U2RX: P3.2 R34.1 U4.72 | length 1616.6
  Bottom Layer w10: R34.1@-140,-678 U4.72 -135,-440 -92,-483 1162,-483 1200,-445 P3.2
U2TX: P3.3 R31.1 U4.71 | length 2076.7
  Top Layer w10: v1(-235,-905) -235,-840 -190,-795 -190,-390 U4.71
  Bottom Layer w10: v1(-235,-905) -147,-905 R31.1 ; U4.71 -95,-385 1155,-385 P3.3
U3RX: P4.2 R30.1 U4.49 | length 1009.7
  Top Layer w20: v1(680,-1140) 680,-920 712,-888 779.88,-888 827.88,-840
  Bottom Layer w20: R30.1 v1(680,-1140) 730,-1190 P4.2@1190,-1190
U3TX: P4.3 R26.1 U4.50 | length 848.7
  Bottom Layer w20: U4.50@760,-842 R26.1 692,-1090 P4.3@1190,-1090
V3.3: P9.1 P10.1 pad.4@1435,-315 pad.6 R26.2 R27.2 R28.2 R29.2 R30.2 R31.2 R32.2 R33.2 R34.2 R43.2 U4.4 | length 6437
  Top Layer w20: v1(90,-1445) v1(90,-1340) v1(90,-1125) v1(90,-900) v1(90,-680) v1(90,-580) 90,-477.88 108,-459.88 108,-167 v1(110,-165) ; v1(900,-160) R43.2 ; v1(1435,-160) 1435,-515 P10.1@1595,-515
  Bottom Layer w20: U4.4 -690,-1490 40,-1490 85,-1445 v1(90,-1445) ; R33.2 v1(90,-1340) ; R31.2 v1(90,-900) 377,-900 ; R34.2 v1(90,-680) 400,-680 440,-720 R28.2 ; R32.2@-12,-1125 v1(90,-1125) 450,-1125 465,-1140 R30.2 ; v1(90,-580) R27.2 ; v1(110,-165) 895,-165 v1(900,-160) v1(1435,-160) ; R26.2 377,-900 ; R29.2 437,-900 377,-900
VCC5: R5.2 R6.2 R10.2 R11.2 R15.2 R16.2 R17.2 T3.1 U4.5 U4.6 | length 3729.5
  Top Layer w50: v1(-975,-830) -1263,-830 ; v1@-940,-1435 -1175,-1435 -1263,-1347 -1263,-830 ; v1@-934,-1454 -911,-1477 -713.9,-1477 -650.9,-1540 U4.5@-650.9,-1629.1 ; T3.1 -860,-177 -934,-251 R5.2 -1200,-337 -1262,-337 -1262,-417.33 -1263,-418.33 -1263,-830
  Bottom Layer w50: R11.2 -937,-1438 v1(-935,-1440) ; R6.2@-1057,-830 v1(-975,-830) ; T3.1@-857,-43 R17.2 -613,-135 -435,-135 -410,-110 -410,-47 R15.2 R16.2
VCC12: D1.2 R18.1 R20.2 | length 279
  Bottom Layer w50: R18.1@-1663,281 R20.2
pads on no net: U1.1 U1.5 U4.3 U4.7 U4.8 U4.9 U4.10 U4.11 U4.12 U4.13 U4.14 U4.15 U4.16 U4.17 U4.18 U4.19 U4.20 U4.21 U4.26 U4.27 U4.28 U4.29 U4.30 U4.31 U4.32 U4.33 U4.34 U4.35 U4.36 U4.37 U4.38 U4.39 U4.40 U4.41 U4.42 U4.43 U4.44 U4.45 U4.46 U4.47 U4.48 U4.52 U4.54 U4.56 U4.59 U4.60 U4.68 U4.69 U4.73 U4.74 U4.75 U4.76 U4.77 U4.78 U4.79 U4.80 U4.81 U4.82 U4.83 U4.84 U4.85 U4.86 U4.87 U4.88 U4.89 U4.90 U4.91 U4.92

## Keep-outs
Keep-Out Layer:
  circle w10: c0,0 r1900.42

## Silkscreen, mask and mechanical layers (free items; w line width, h text height)
Top Overlay:
  text "AD2O" at 1345,745 h60
  text "AD3+" at 1485,155 h60
  text "PA1" at 1675,-285 h60
  text "U2TR" at 1270,-435 h60
  text "PA2" at 1340,-860 h60
  text "PA3" at 1535,-860 h60
  text "U3TR" at 1270,-1245 h60
  text "XDM-I T0.2 20180502" at -610,-1785 h60
Drill Drawing:
  text ".LEGEND" at 2010,-1670 h60
  text "Drill Drawing." at 2010,-1770 h60